# Altium PCB plp-ctop_3a.PcbDoc
Units mm, origin at the board's own origin, x right, y up, seen from the top; angles counter-clockwise.
Board outline 35.01 x 41.5 mm, 2 copper layers (Top Layer, Bottom Layer), stack 0.336 mm thick; 8 components, 11 nets, 39 pads, 1 vias.
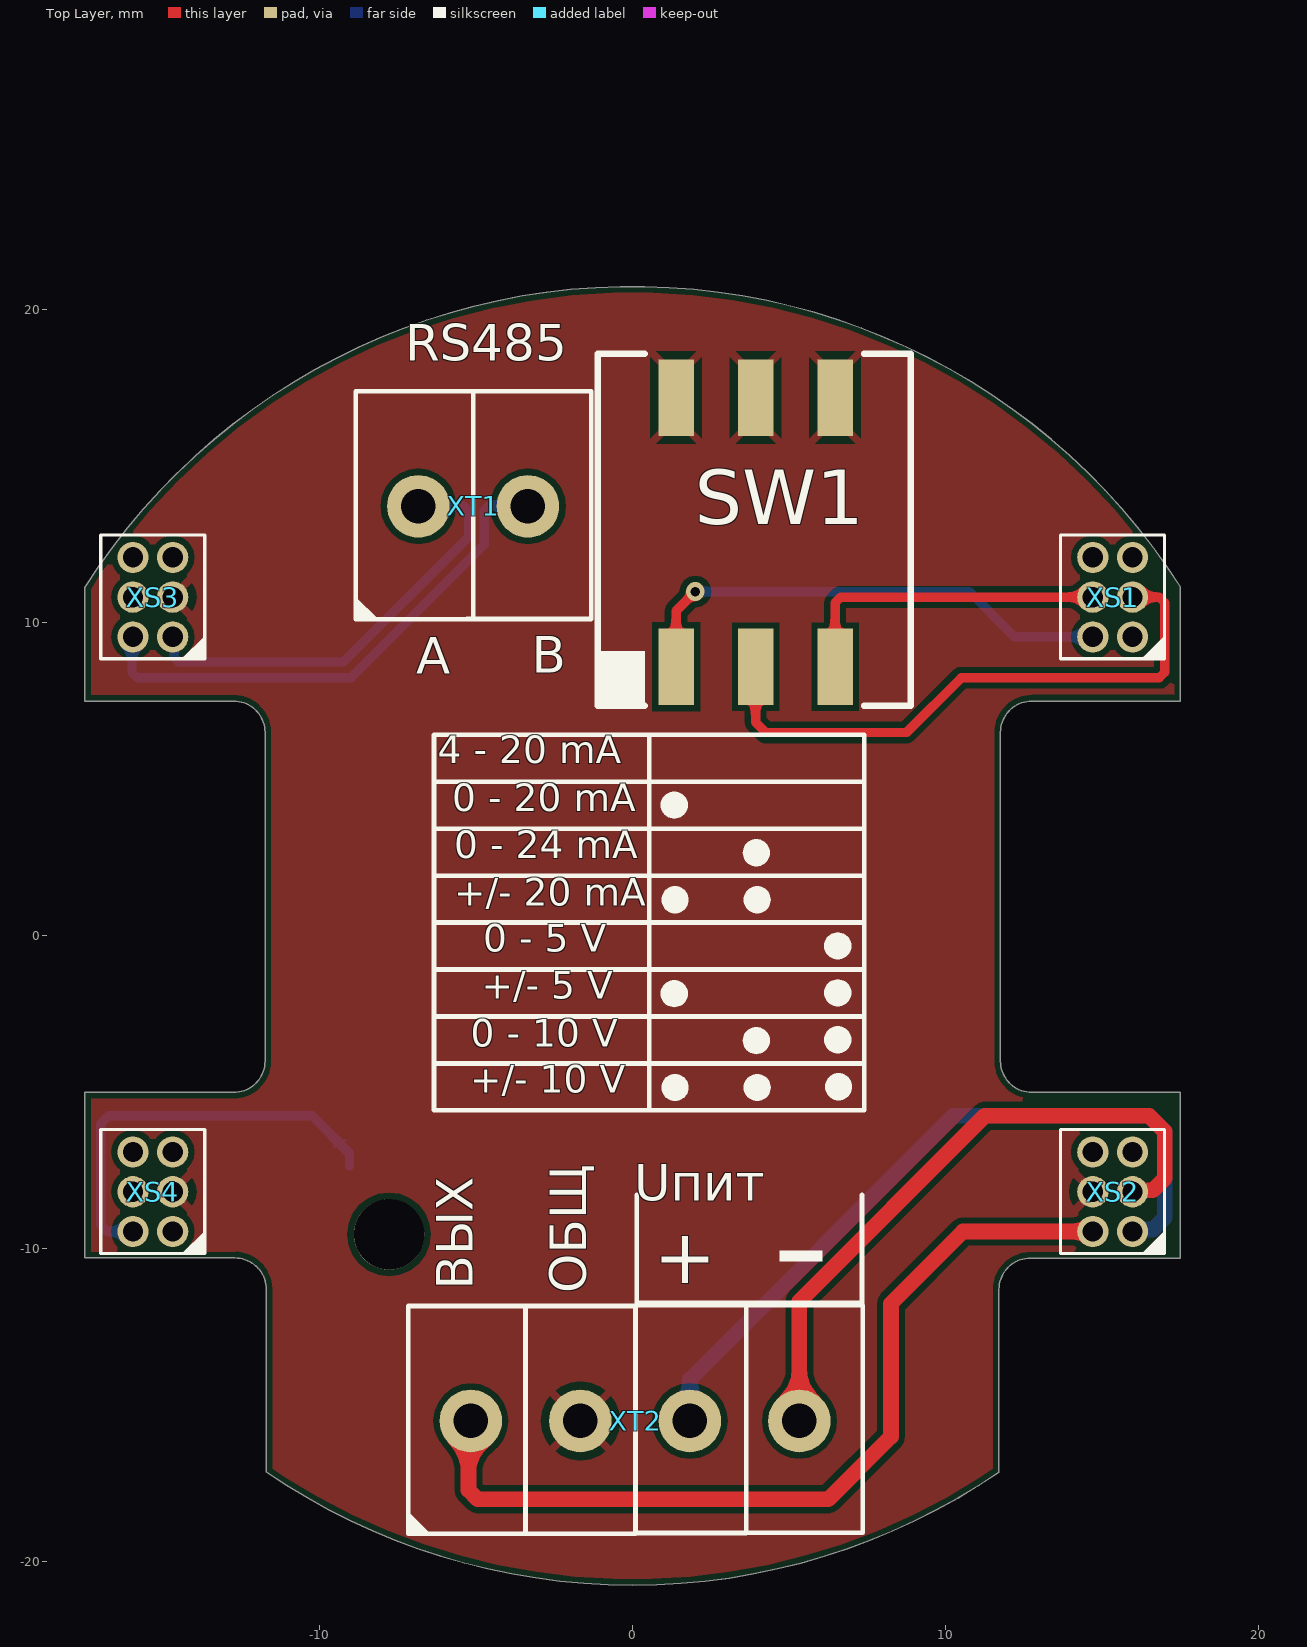
[diagram p0: Top Layer view]
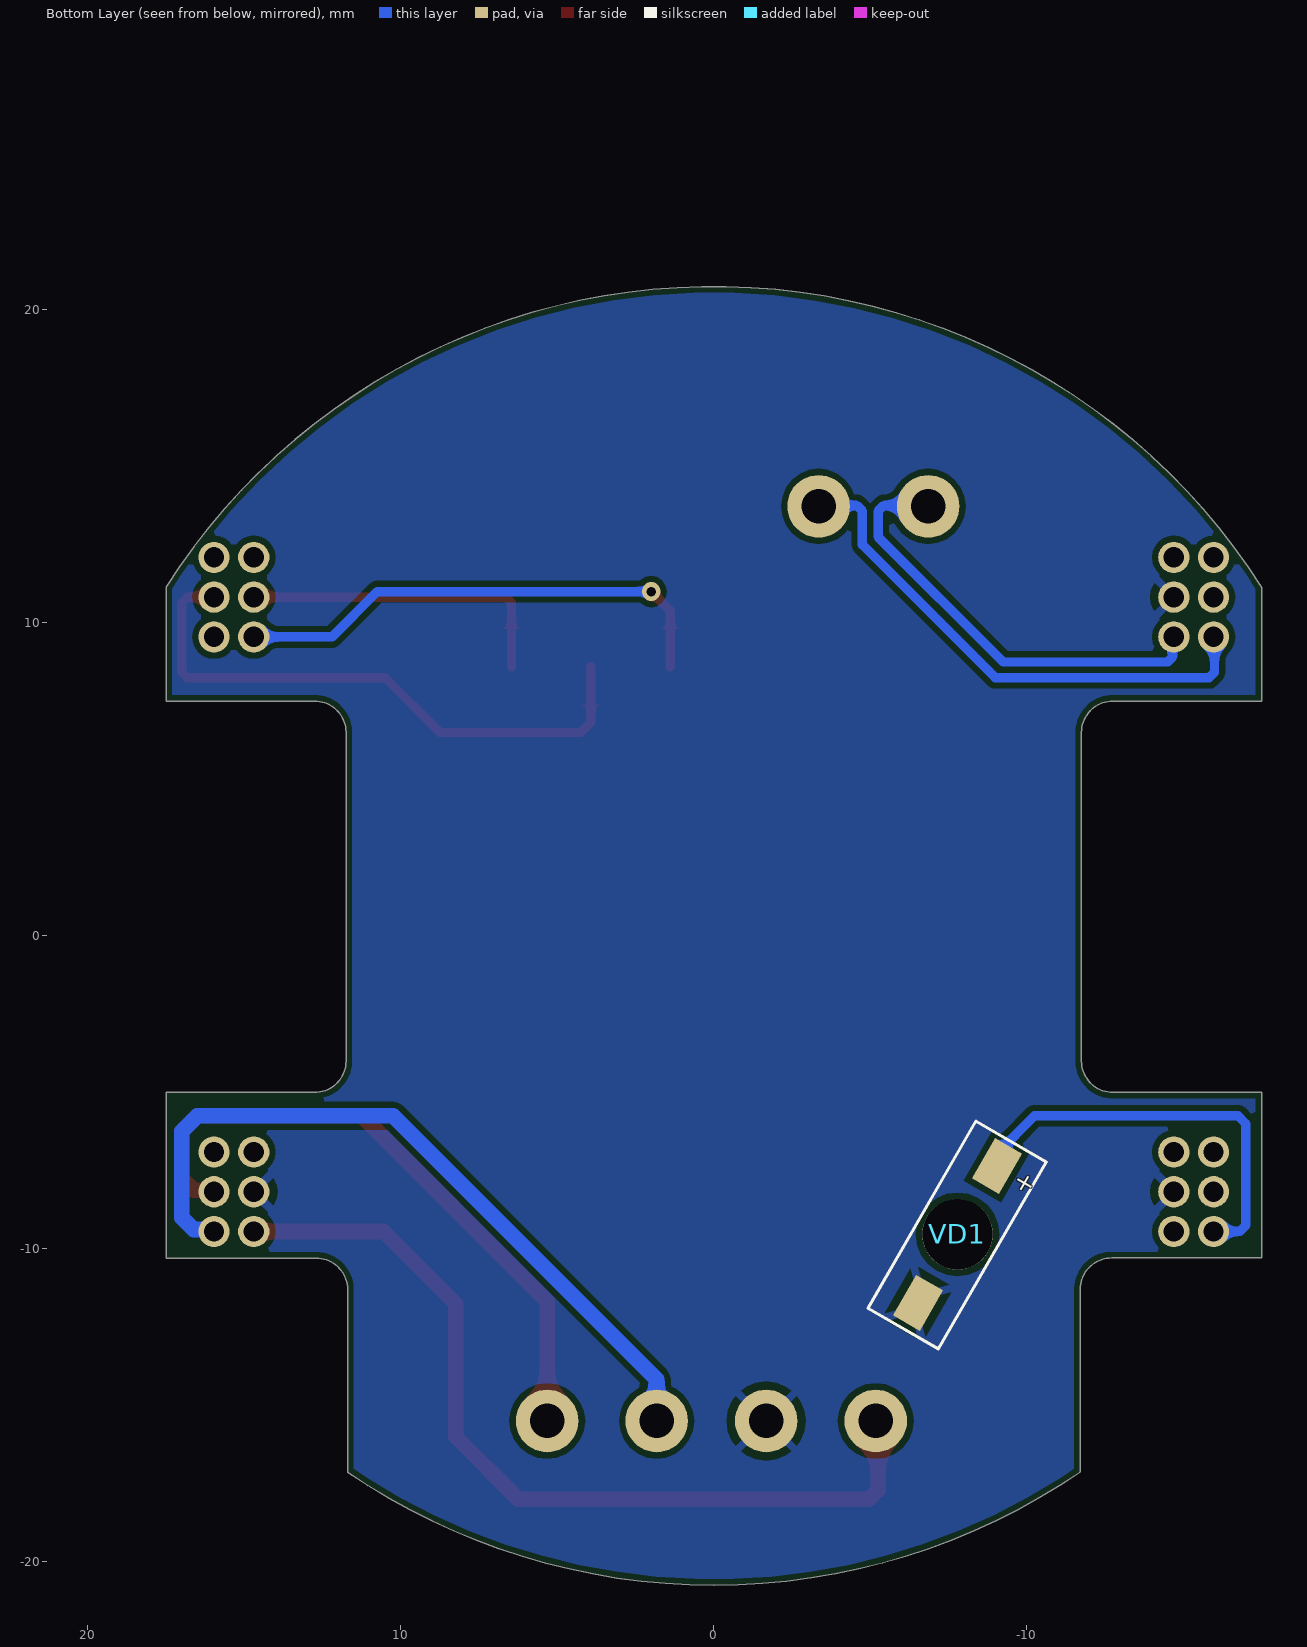
[diagram p1: Bottom Layer view, seen from below]

## Layer stack, top to bottom
Top Solder: solder mask 0.0102, Solder Resist, Dk 3.5
Top Layer: signal copper 0.018
Dielectric1: prepreg 0.3, FR-4, Dk 4.8
Bottom Layer: signal copper 0.018
Bottom Solder: solder mask 0.0102, Solder Resist, Dk 3.5

## Board outline
-17.511,-10.292 -17.511,-5 -12.75,-5 ccw(c-12.75,-4) -11.75,-4 -11.75,6.5 ccw(c-12.75,6.5) -12.75,7.5 -17.511,7.5 -17.511,11.132 cw(c0,0) 17.5,11.15 17.5,7.5 12.75,7.5 ccw(c12.75,6.5) 11.75,6.5 11.75,-4 ccw(c12.75,-4) 12.75,-5 17.5,-5 17.5,-10.3 12.7,-10.3 ccw(c12.7,-11.3) 11.7,-11.3 11.7,-17.137 cw(c0,0) -11.711,-17.129 -11.711,-11.292 ccw(c-12.711,-11.292) -12.711,-10.292

## Design rules (kind name [scope] priority, off if disabled: settings)
AcuteAngle [All] p1: minimum=4.40000000000000E+0001 checktracksonly=FALSE
BoardOutlineClearance [All] p1: gap=0.2 ignorepadtopadclearanceinfootprint=FALSE except(0: Arc-SplitContinuation Track-SplitContinuation SMDPad-SplitContinuation THPad-SplitContinuation Via-SplitContinuation Fill-SplitContinuation Poly-SplitContinuation Region-SplitContinuation Text-SplitContinuation)
Clearance Clearance_Poly [All] p1: gap=0.2 ignorepadtopadclearanceinfootprint=FALSE except(0: Arc-Hole Track-Hole SMDPad-Hole THPad-Hole Via-Hole Fill-Hole Poly-Hole Region-Hole Text-Hole)
HoleSize [All] p1: absolutevalues=TRUE maxlimit=2.54 minlimit=0.2 maxpercent=80.000 minpercent=20.000
MinimumAnnularRing [All] p1: minimumring=0.15
MinimumSolderMaskSliver [All] p1: minsoldermaskwidth=0
NetAntennae [All] p1: netantennaetolerance=5
PermittedLayers [All] p1: toplayerpermitted=TRUE bottomlayerpermitted=TRUE
PolygonConnect PolygonConnect_via [isvia] p1: connectstyle=Direct reliefconductorwidth=0.254 reliefentries=4 polygonreliefangle="90 Angle" airgapwidth=0.254
PolygonConnect [All] p2: connectstyle=Relief reliefconductorwidth=0.254 reliefentries=4 polygonreliefangle="45 Angle" airgapwidth=0.254
RoutingVias [All] p1: holewidth=0.3 width=0.8 viastyle="Through Hole" minholewidth=0.2 minwidth=0.6 maxholewidth=0.4 maxwidth=1.27
SMDNeckDown [All] p1: percent=100.000
SMDToCorner [All] p1: distance=59055
SMDToPlane [All] p1: distance=0
ShortCircuit [All] p1: allowed=TRUE
SilkToSilkClearance [All] p1: silktosilkclearance=0.15
SilkToSolderMaskClearance SilkscreenOverComponentPads [IsPad] p1: minsilkscreentomaskgap=0.15 clearancetoexposedcopper=TRUE
SolderMaskExpansion [All] p1: expansion=0.1 istentingtop=FALSE
ViasUnderSMD [All] p1: allowed=TRUE
Width [All] p1: maxlimit=3 minlimit=0.15 preferedwidth=0.25 minimp=50.000000 maximp=50.000000 favimp=50.000000
24 further rules are at their usual default settings.

## Components (designator, comment, footprint, x,y, rotation, side; value= is the part's Value field where it differs from the comment)
SW1 "219-3MST" 219-3MST 1.385,8.6 r90 top
VD1 "KM2520SURCK09" KM2520SURCK09 -9.05,-7.352 r300 bottom
XS1 "PLLD-6" "CON: PLL-6(2x3R1.27female)" 17.012,8.8 r90 top locked
XS2 "PLLD-6" "CON: PLL-6(2x3R1.27female)" 17.012,-10.2 r90 top locked
XS3 "PLLD-6" "CON: PLL-6(2x3R1.27female)" -13.658,8.8 r90 top locked
XS4 "PLLD-6" "CON: PLL-6(2x3R1.27female)" -13.658,-10.2 r90 top locked
XT1 "MKDS 1/2 - 3,5" "MKDS 1/2 - 3,5" 3.65,13.725 r90 top
XT2 "MKDS 1/4 - 3,5" "MKDS 1/4 - 3,5" 5.325,-15.5 r90 top

## Footprints (in the part's own frame and the unit in brackets; to place one, negate y for a bottom-side part, rotate by r counter-clockwise, add the part's x,y. Pads: shape width x height; smd on the part's side, far side on the other; paste and mask are expansions set on the pad)
219-3MST [mm]
  rect 2.44x1.13 smd: 1(0,0) 2(0,-2.54) 3(0,-5.08) 4(8.6,-5.08) 5(8.6,-2.54) 6(8.6,0)
  silkscreen extent -1.25,-7.5 10,2.5, body extent -0.45,-7.09 9.45,2, height 4.05
"CON: PLL-6(2x3R1.27female)" [mm]
  round 1 hole 0.65: 1(0.754,1.042) 2(0.754,2.312) 3(2.024,1.042) 4(2.024,2.312) 5(3.294,1.042) 6(3.294,2.312)
  silkscreen extent 0.05,0.02 4.01,3.34
KM2520SURCK09 [mm] "SM LED Body 1.6x0.8mm; 2 Flat Leads"
  round 2.25 hole 2.25 unplated: 0(2.525,0)
  rect 1.5x1 smd: 1(0,0) 2(5.05,0)
  silkscreen extent -0.9,-1.3 6,1.3, body extent 1.1,-0.9 3.5,1, height 1.5
"MKDS 1/2 - 3,5" [mm]
  round 2 hole 1.1: 1(0,10.5) 2(0,7)
  silkscreen extent -3.63,4.97 3.67,12.53, body extent -3.57,4.97 3.67,12.47, height 8.5
"MKDS 1/4 - 3,5" [mm]
  round 2 hole 1.1: 1(0,10.5) 2(0,7) 3(0,3.5) 4(0,0)
  silkscreen extent -3.63,-2.02 3.7,12.53, body extent -3.57,-2.02 3.67,12.47, height 8.5

## Part data
VD1: "LED"
XS1 XS2 XS3 XS4: library part PLLD-6(Female), "Step 1.27"
XT1 XT2: "Клемник", Color=green, Manufacturer="Poenix Contact", ComponentLink1Description="Data Sheet", ComponentLink1URL=http://eshop.phoenixcontact.de/phoenix/treeViewClick.do?UID=1725656&parentUID=852628134&reloadFrame=true
  XT1: OrderCode=1751248
  XT2: OrderCode=1751264

## Via types
v1: diameter 0.6, hole 0.3, Top Layer to Bottom Layer, tented both sides, 1 vias

## Nets (pads, with @x,y where several pads share a name; then routed paths per layer and width w, separated by ;. In a path a pad name is that pad's centre, name@x,y a point inside that pad or via, vN(x,y) a via of type N, cw(c..) or ccw(c..) an arc to the next point about the centre after c; other vN are vias at no path point)
+Uп: XS2.1 XT2.3 | length 24.6
  Bottom Layer w0.5: XT2.3@1.825,-15.95 1.825,-14.175 10.25,-5.75 16.5,-5.75 17,-6.25 17,-9 16.62,-9.38 16.036,-9.38 XS2.1
-Uп: XS2.3 XT2.4 | length 21.3
  Top Layer w0.5: XT2.4@5.325,-15.95 5.325,-11.675 11.25,-5.75 16.5,-5.75 17,-6.25 17,-7.75 16.62,-8.13 16.016,-8.13 XS2.3
A: XS3.1 XT1.1 | length 14.3
  Bottom Layer w0.3: XS3.1 -14.654,9.507 -14.654,8.904 -14.5,8.75 -9.25,8.75 -5.25,12.75 -5.25,13.574 -5.426,13.75 -6.825,13.75 XT1.1
B: XS3.2 XT1.2 | length 16.8
  Bottom Layer w0.3: XS3.2 -16,9.524 -16,8.426 -15.824,8.25 -9,8.25 -4.75,12.5 -4.75,13.574 -4.574,13.75 -3.5,13.75 -3.375,13.75 XT1.2
GND: SW1.4 SW1.5 SW1.6 VD1.2 XS2.4 XS3.3 XS4.3 XT2.2
GPIO0: SW1.1 XS1.2 | length 16
  Top Layer w0.3: SW1.1 1.385,10.385 v1(2,11)
  Bottom Layer w0.3: v1(2,11) 10.75,11 12.196,9.554 XS1.2
GPIO1: SW1.2 XS1.3 | length 19.1
  Top Layer w0.3: SW1.2 3.925,6.825 4.25,6.5 8.75,6.5 10.5,8.25 16.824,8.25 17,8.426 17,10.648 16.824,10.824 XS1.3
GPIO2: SW1.3 XS1.4 | length 10.4
  Top Layer w0.3: SW1.3 6.465,10.648 6.641,10.824 XS1.4
LED: VD1.1 XS4.2 | length 13.3
  Bottom Layer w0.3: XS4.2 -16.804,-9.446 -17,-9.25 -17,-6 -16.75,-5.75 -10.25,-5.75 -9.05,-6.95 VD1.1
OUT: XS2.2 XT2.1 | length 27.9
  Top Layer w0.5: XT2.1@-5.175,-15.95 -5.25,-16.025 -5.25,-17.707 -4.957,-18 6.25,-18 8.25,-16 8.25,-11.75 10.554,-9.446 XS2.2
PE: XS4.1
pads on no net: VD1.0 XS1.1 XS1.5 XS1.6 XS2.5 XS2.6 XS3.4 XS3.5 XS3.6 XS4.4 XS4.5 XS4.6

## Polygon pours and split planes (outlines as drawn)
GND on Top Layer "GND_TOP" (solid, pour order 0): -18,21 18,21 18,-21 -18,-21
GND on Bottom Layer "GND_BOT" (solid, pour order 1): -18,21 18,21 18,-21 -18,-21

## Other copper
Top Layer:
  region: 20.1,27.9
  region: 20.1,27.9
  region: 20.1,27.9
  region: 20.1,27.9
  region: 20.1,27.9
  region: 20.1,27.9
  region: 20.1,27.9
  region: 20.1,27.9
  region: 20.1,27.9
  region: 20.1,27.9
  region: 20.1,27.9
  region: 20.1,27.9
  region: 20.1,27.9

## Silkscreen, mask and mechanical layers (free items; w line width, h text height)
Top Overlay:
  region: 0.895,4.18 ccw(c1.325,4.18) 1.325,3.75 ccw(c1.325,4.18) 1.755,4.18 ccw(c1.325,4.18) 1.325,4.61 ccw(c1.325,4.18)
  region: 0.92,-4.845 ccw(c1.35,-4.845) 1.35,-5.275 ccw(c1.35,-4.845) 1.78,-4.845 ccw(c1.35,-4.845) 1.35,-4.415 ccw(c1.35,-4.845)
  region: 3.545,-4.845 ccw(c3.975,-4.845) 3.975,-5.275 ccw(c3.975,-4.845) 4.405,-4.845 ccw(c3.975,-4.845) 3.975,-4.415 ccw(c3.975,-4.845)
  region: 6.145,-4.82 ccw(c6.575,-4.82) 6.575,-5.25 ccw(c6.575,-4.82) 7.005,-4.82 ccw(c6.575,-4.82) 6.575,-4.39 ccw(c6.575,-4.82)
  region: 3.52,-3.345 ccw(c3.95,-3.345) 3.95,-3.775 ccw(c3.95,-3.345) 4.38,-3.345 ccw(c3.95,-3.345) 3.95,-2.915 ccw(c3.95,-3.345)
  region: 6.12,-3.32 ccw(c6.55,-3.32) 6.55,-3.75 ccw(c6.55,-3.32) 6.98,-3.32 ccw(c6.55,-3.32) 6.55,-2.89 ccw(c6.55,-3.32)
  region: 0.895,-1.845 ccw(c1.325,-1.845) 1.325,-2.275 ccw(c1.325,-1.845) 1.755,-1.845 ccw(c1.325,-1.845) 1.325,-1.415 ccw(c1.325,-1.845)
  region: 6.12,-1.82 ccw(c6.55,-1.82) 6.55,-2.25 ccw(c6.55,-1.82) 6.98,-1.82 ccw(c6.55,-1.82) 6.55,-1.39 ccw(c6.55,-1.82)
  region: 6.12,-0.32 ccw(c6.55,-0.32) 6.55,-0.75 ccw(c6.55,-0.32) 6.98,-0.32 ccw(c6.55,-0.32) 6.55,0.11 ccw(c6.55,-0.32)
  region: 0.92,1.155 ccw(c1.35,1.155) 1.35,0.725 ccw(c1.35,1.155) 1.78,1.155 ccw(c1.35,1.155) 1.35,1.585 ccw(c1.35,1.155)
  region: 3.545,1.155 ccw(c3.975,1.155) 3.975,0.725 ccw(c3.975,1.155) 4.405,1.155 ccw(c3.975,1.155) 3.975,1.585 ccw(c3.975,1.155)
  region: 3.52,2.655 ccw(c3.95,2.655) 3.95,2.225 ccw(c3.95,2.655) 4.38,2.655 ccw(c3.95,2.655) 3.95,3.085 ccw(c3.95,2.655)
  region: 4.7,-10.062 4.7,-10.4 6.05,-10.4 6.05,-10.062
  lines w0.15: -6.35,-4.075 0.525,-4.075 7.4,-4.075 ; -6.35,-2.575 0.525,-2.575 7.4,-2.575 ; -6.35,-1.075 0.525,-1.075 7.4,-1.075 ; -6.35,0.425 0.525,0.425 7.4,0.425 ; -6.35,1.925 0.525,1.925 7.4,1.925 ; -6.35,3.425 0.525,3.425 7.4,3.425 ; -6.35,4.925 0.525,4.925 7.4,4.925 ; 0.125,-8.275 0.125,-11.725 7.325,-11.725 7.325,-8.275 ; 0.525,-5.575 -6.35,-5.575 -6.35,6.425 0.525,6.425 ; 0.525,-5.575 0.525,6.425 ; 0.525,-5.575 7.4,-5.575 7.4,6.425 0.525,6.425
  text "RS485" at -7.274,17.998 h2
  text "B" at -3.225,8.025 h2
  text "A" at -6.925,8 h2
  text "4 - 20 mA" at -6.225,5.225 h1.5
  text "0 - 20 mA" at -5.775,3.7 h1.5
  text "0 - 24 mA" at -5.7,2.2 h1.5
  text "+/- 20 mA" at -5.7,0.675 h1.5
  text "0 - 5 V" at -4.775,-0.8 h1.5
  text "+/- 5 V" at -4.825,-2.3 h1.5
  text "0 - 10 V" at -5.175,-3.825 h1.5
  text "+/- 10 V" at -5.2,-5.3 h1.5
  text "Uпит" at 0.05,-8.85 h2
  text "ВЫХ" at -4.725,-11.3 h2 r90
  text "ОБЩ" at -1.1,-11.425 h2 r90
  text "+" at 0.675,-11.675 h3
Bottom Solder:
  circle w0: c0,0 r10
  region: -10,0 ccw(c0,0) 0,-10 ccw(c0,0) 10,0 ccw(c0,0) 0,10 ccw(c0,0)
  lines w0.4: -12,-8 -10.5,-8 ; -11.25,-8.75 -11.25,-7.25
Mechanical 3:
  circle w0.15: c0,0 r10
Mechanical 4:
  lines w0.15: -12.761,-5 -17.511,-5 -17.511,-9.492 -17.511,-10.292 -12.711,-10.292 cw(c-12.711,-11.292) -11.711,-11.292 -11.711,-17.129 ccw(c0,0) 11.7,-17.137 11.7,-11.3 cw(c12.7,-11.3) 12.7,-10.3 17.5,-10.3 17.5,-9.5 17.5,-5 12.75,-5 cw(c12.75,-4) 11.75,-4 11.75,6.5 cw(c12.75,6.5) 12.75,7.5 17.5,7.5 17.5,11.15 ccw(c0,0) -17.511,11.132 -17.511,7.5 -12.761,7.5 ; -12.75,-5 ccw(c-12.75,-4) -11.75,-4 -11.75,6.5 ccw(c-12.75,6.5) -12.75,7.5

## Text inside footprints (layer, text, board x,y; h text height)
VD1: Bottom Overlay "+" at -9.72,-7.392 h1 r120